# Altium PCB PCB1.PcbDoc
Units mm, origin at the board's own origin, x right, y up, seen from the top; angles counter-clockwise.
Board outline 43 x 53.5 mm, 2 copper layers (Top Layer, Bottom Layer), stack 1.64 mm thick; 48 components, 28 nets, 241 pads, 77 vias.
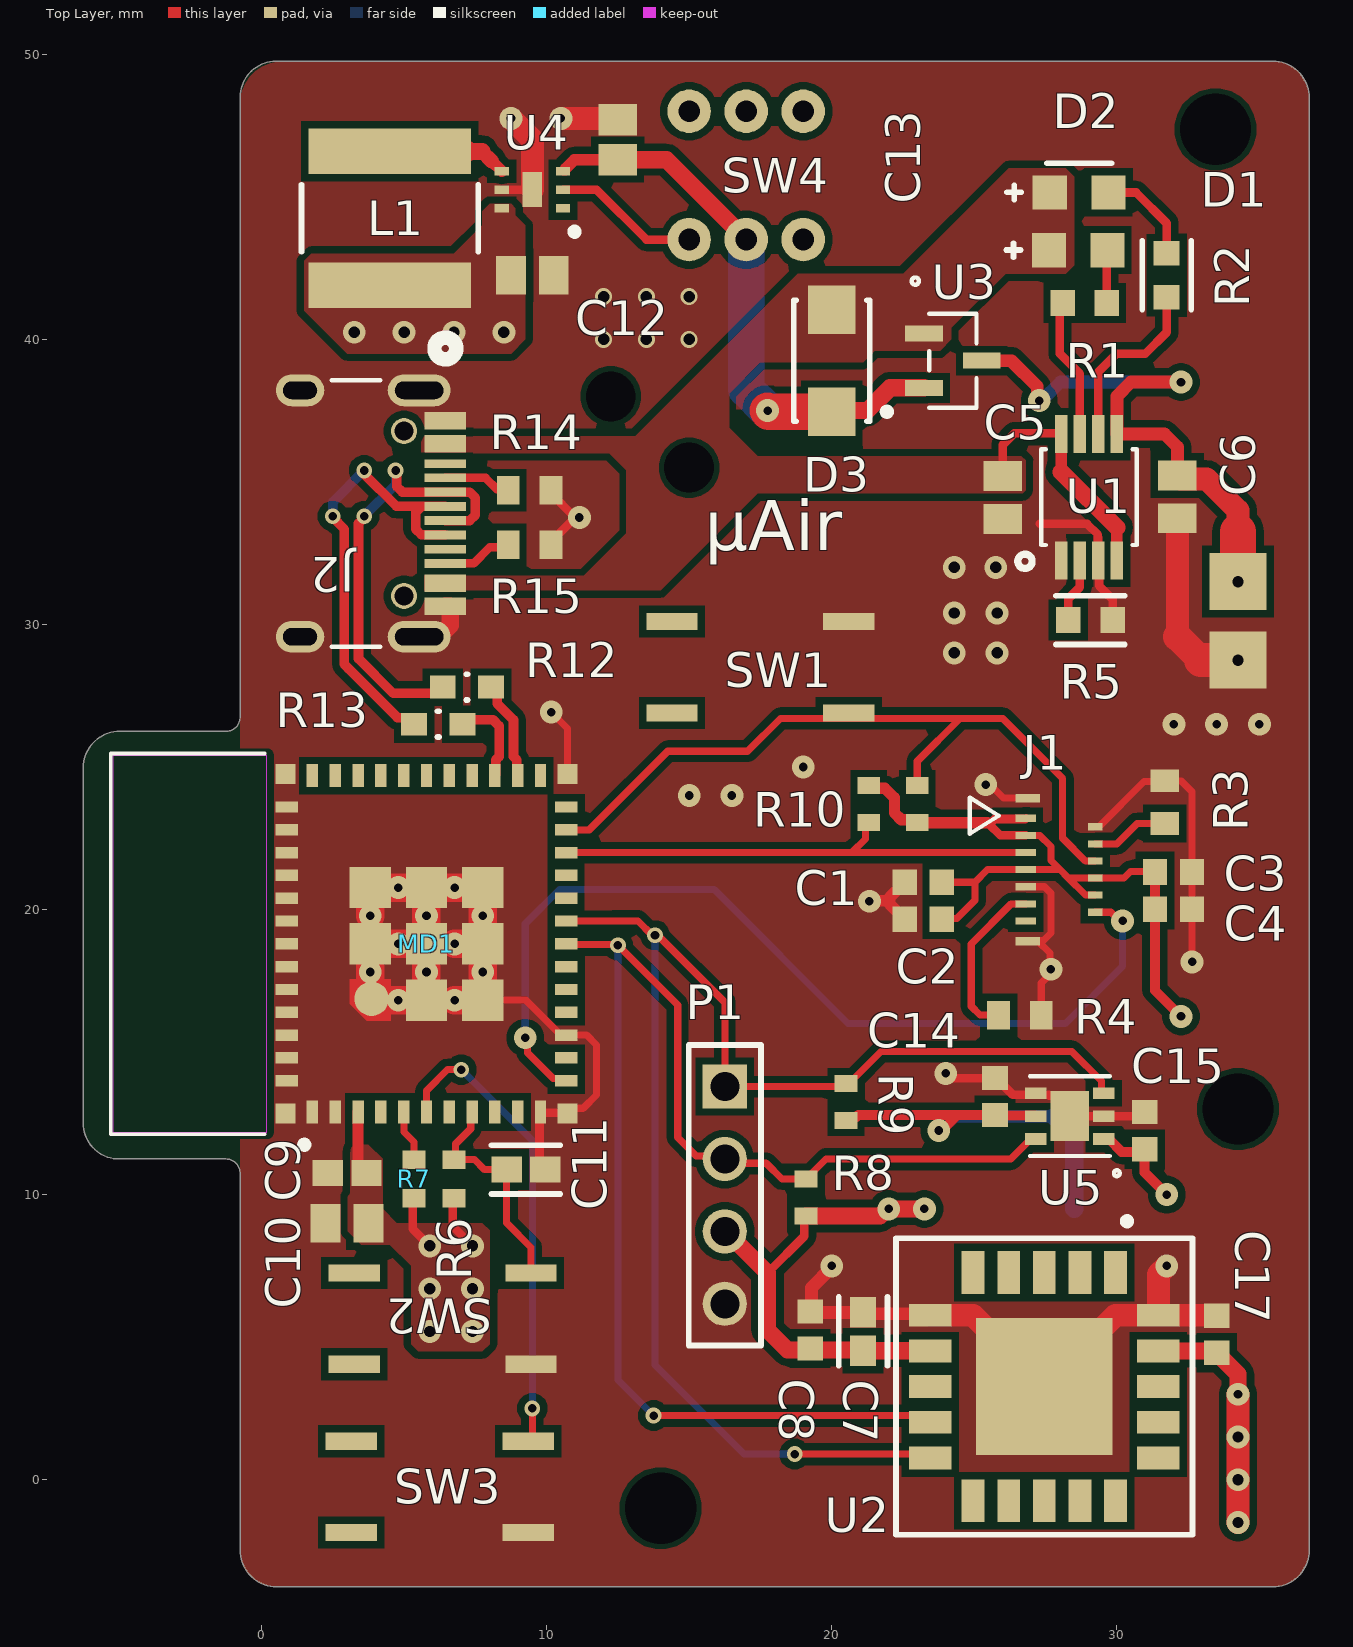
[diagram p0: Top Layer view]
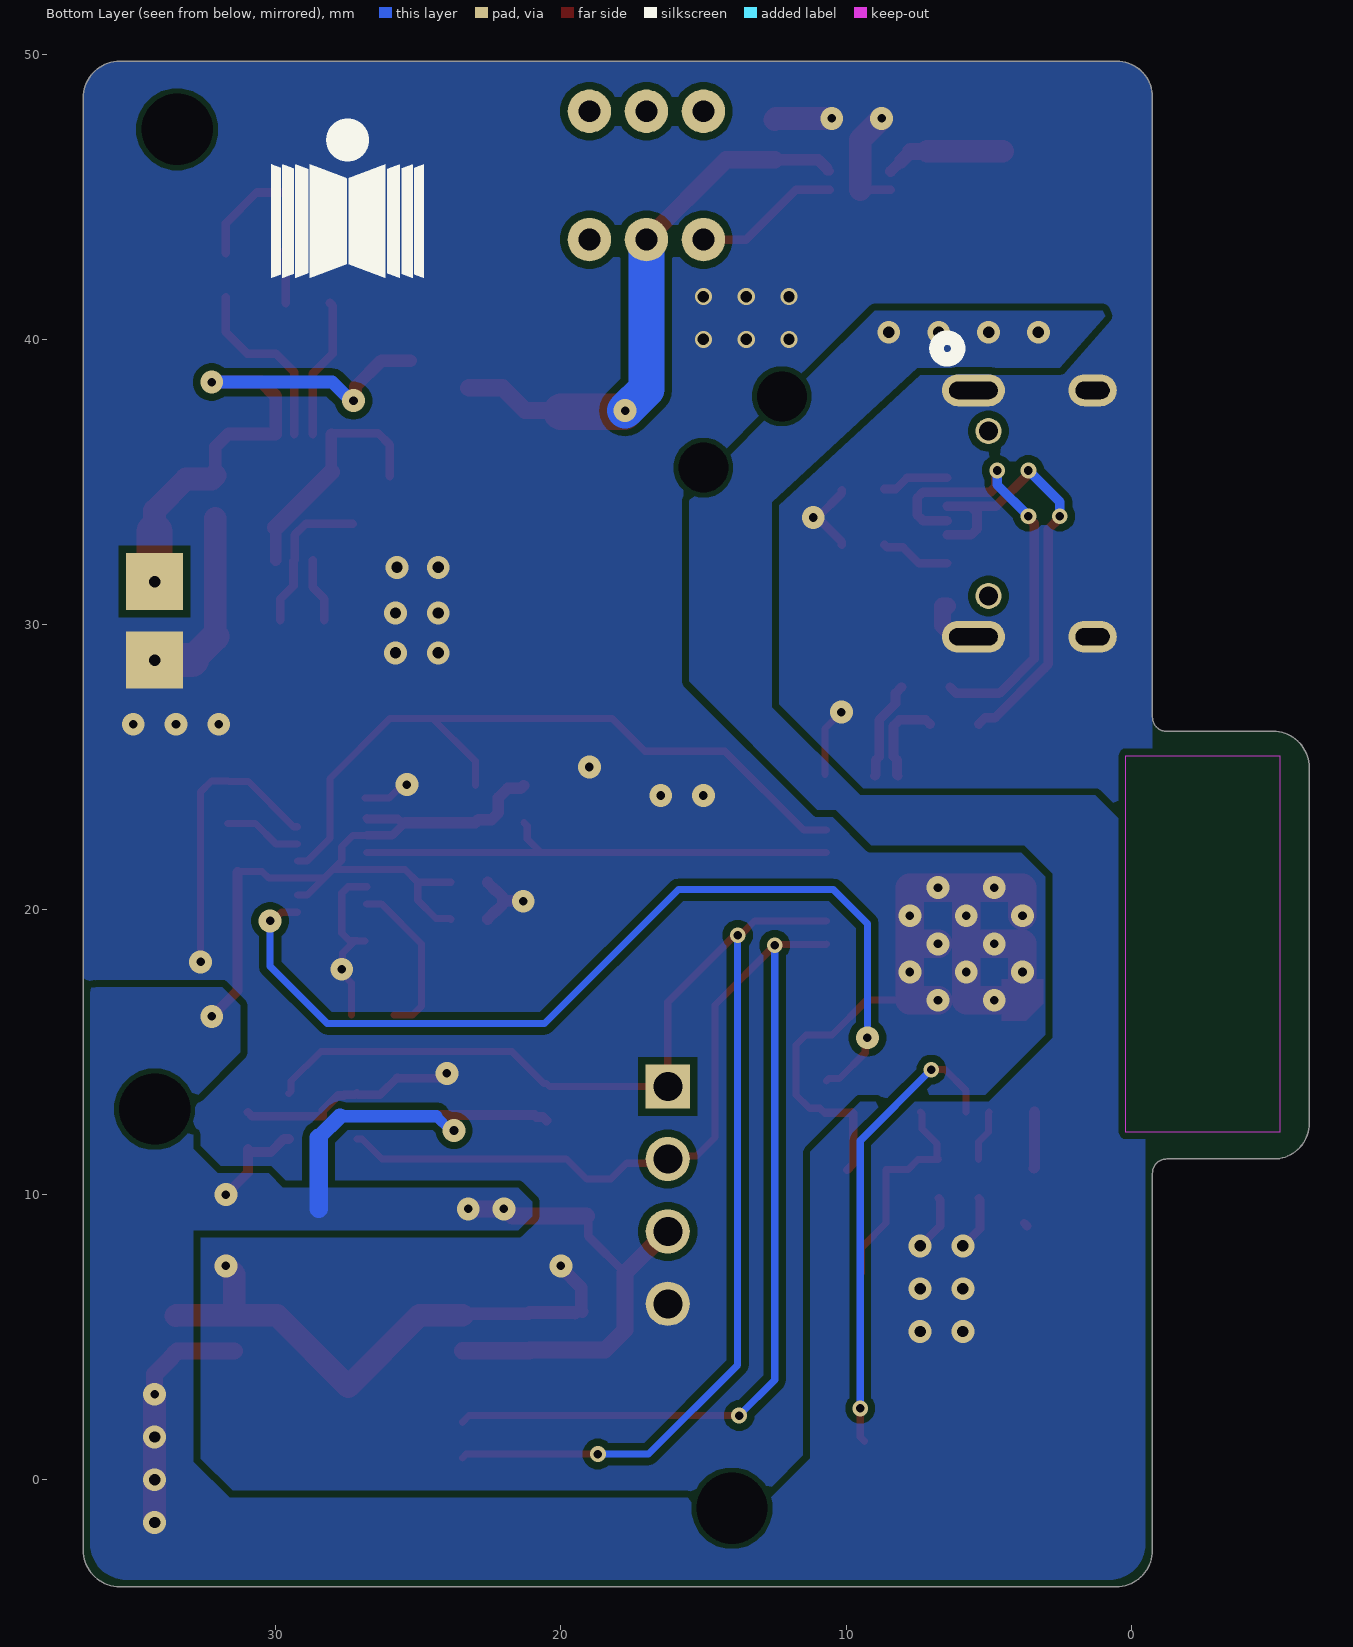
[diagram p1: Bottom Layer view, seen from below]

## Layer stack, top to bottom
Top Solder: solder mask 0.0102, Solder Resist, Dk 3.5
Top Layer: signal copper 0.07
Dielectric 1: dielectric 1.5, FR-4, Dk 4.8
Bottom Layer: signal copper 0.07
Bottom Solder: solder mask 0.0102, Solder Resist, Dk 3.5

## Board outline
-5,11.25 cw(c-5,12.5) -6.25,12.5 -6.25,24.98 cw(c-4.98,24.98) -4.98,26.25 -1.25,26.25 ccw(c-1.25,26.75) -0.75,26.75 -0.75,48.5 cw(c0.5,48.5) 0.5,49.75 35.48,49.75 cw(c35.48,48.48) 36.75,48.48 36.75,-2.48 cw(c35.48,-2.48) 35.48,-3.75 0.52,-3.75 cw(c0.52,-2.48) -0.75,-2.48 -0.75,10.75 ccw(c-1.25,10.75) -1.25,11.25

## Design rules (kind name [scope] priority, off if disabled: settings)
BoardOutlineClearance [All] p1: gap=0.5 ignorepadtopadclearanceinfootprint=FALSE except(0: Fill-OutlineEdge Fill-CavityEdge Fill-CutoutEdge Fill-SplitBarrior Fill-SplitContinuation Poly-OutlineEdge Region-OutlineEdge Text-OutlineEdge; 1: Poly-CutoutEdge Region-CutoutEdge Text-CutoutEdge; 3: Poly-CavityEdge Poly-SplitBarrior Poly-SplitContinuation Region-CavityEdge Region-SplitBarrior Region-SplitContinuation Text-CavityEdge Text-SplitBarrior Text-SplitContinuation)
Clearance [All] p1: gap=0.254 ignorepadtopadclearanceinfootprint=TRUE except(0.13: SMDPad-SMDPad; 0.15: Arc-Arc Arc-Track Arc-SMDPad Arc-THPad Track-Track Track-SMDPad Track-THPad; 0.178: Arc-Hole Track-Hole SMDPad-THPad SMDPad-Hole THPad-Hole Via-Hole Fill-Hole Poly-Hole Region-Hole Text-Hole; 0.2: Via-Via; 0.25: Arc-Via Track-Via)
DiffPairsRouting [All] p1: maxlimit=0.18 minlimit=0.16 mostfreqgap=0.16 toplayer_minwidth=0.3 toplayer_maxwidth=0.5 toplayer_prefwidth=0.334 bottomlayer_minwidth=0.3 bottomlayer_maxwidth=0.5 bottomlayer_prefwidth=0.334 impedanceprofiledriven=TRUE impedanceprofileid={9D25BB9F-9C6A-4115-A333-6D22519091E7} impedanceprofilevalue=90.000000 maxuncoupledlength=12.7
HoleSize [All] p1: absolutevalues=TRUE maxlimit=2.54 minlimit=0.1 maxpercent=80.000 minpercent=20.000
HoleToHoleClearance [All] p1: gap=0.2 allowstackedmicrovias=TRUE
MinimumAnnularRing [All] p1: minimumring=0.1
MinimumSolderMaskSliver [All] p1: minsoldermaskwidth=0.08
PlaneClearance [All] p1: clearance=0.3
PlaneConnect [All] p1: planeconnectstyle=Direct reliefexpansion=0.508 reliefentries=4 reliefconductorwidth=0.254 reliefairgap=0.254
PolygonConnect [All] p1: connectstyle=Direct reliefconductorwidth=0.254 reliefentries=4 polygonreliefangle="90 Angle" airgapwidth=0.254
RoutingVias [All] p1: holewidth=0.25 width=0.4 viastyle="Through Hole" minholewidth=0.15 minwidth=0.27 maxholewidth=0.711 maxwidth=1.27
SolderMaskExpansion [All] p1: expansion=0.102 istentingtop=FALSE
SupplyNets "Schematic Supply Nets_4" [InNet('VBUS')] p1: voltage=0.000
SupplyNets "Schematic Supply Nets_5" [InNet('VDD')] p2: voltage=0.000
SupplyNets "Schematic Supply Nets_7" [InNet('GND')] p3: voltage=0.000
SupplyNets "Schematic Supply Nets_6" [InNet('VBAT')] p4: voltage=0.000
SupplyNets "Schematic Supply Nets_3" [InNet('VBUS')] p5: voltage=0.000
SupplyNets "Schematic Supply Nets_2" [InNet('VDD')] p6: voltage=0.000
SupplyNets "Schematic Supply Nets_1" [InNet('VBAT')] p7: voltage=0.000
SupplyNets "Schematic Supply Nets" [InNet('GND')] p8: voltage=0.000
UnRoutedNet [All] p1: checkbadconnections=TRUE
Width [All] p1: maxlimit=1.27 minlimit=0.2 preferedwidth=0.3
23 further rules are at their usual default settings.

## Classes and differential pairs
component class Sheet1: C1 C2 C3 C4 C5 C6 C7 C8 C9 C10 C11 C12 C13 C14 C15 C17 D1 D2 D3 J1 J2 L1 P1 R1 R2 R3 R4 R5 R8 R9 R10 R12 R13 R14 R15 SW1 SW2 SW3 SW4 U1 U2 U3 U4 U5
differential pair USB_D: +USB_D_P -USB_D_N
differential pair USB: +USB_P -USB_N

## Components (designator, comment, footprint, x,y, rotation, side; value= is the part's Value field where it differs from the comment)
C1 "C0603C105K4RACTU" CAPC1608X90X35LL15T15 23.209,20.959 r0 top value=1µF
C2 "C0603C105K4RACTU" CAPC1608X90X35LL15T15 23.209,19.659 r0 top value=1µF
C3 "C0603C105K4RACTU" CAPC1608X90X35LL15T15 31.985,21.315 r180 top value=1µF
C4 "C0603C105K4RACTU" CAPC1608X90X35LL15T15 31.985,20.015 r180 top value=1µF
C5 "GRM21BR71A106KE51L" CAPC2013X140X45LL15T25 26,34.45 r90 top value=10µF
C6 "GRM21BR71A106KE51L" CAPC2013X140X45LL15T25 32.125,34.475 r90 top value=10µF
C7 "CC0603KRX7R9BB104" FP-CC0603-DA-IPC_B 21.1,5.2 r270 top value=100nF
C8 "C0603C105K4RACTU" CAPC1608X90X35LL15T15 19.25,5.25 r270 top value=1µF
C9 "CC0603KRX7R9BB104" FP-CC0603-DA-IPC_B 3,10.75 r180 top value=100nF
C10 "GRM21BR71A106KE51L" CAPC2013X140X45LL15T25 3,9 r0 top value=10µF
C11 "CC0603KRX7R9BB104" FP-CC0603-DA-IPC_B 9.275,10.875 r0 top value=100nF
C12 "GRM21BR71A106KE51L" CAPC2013X140X45LL15T25 9.5,42.25 r180 top value=10µF
C13 "08053D475KAT2A" CAPC2013X140X50LL20T25 12.5,47 r270 top value=4.7µF
C14 "C0603C105K4RACTU" CAPC1608X90X35LL15T15 25.728,13.444 r270 top value=1µF
C15 "C0603C105K4RACTU" CAPC1608X90X35LL15T15 30.978,12.244 r270 top value=1µF
C17 "C0603C105K4RACTU" CAPC1608X90X35LL15T15 33.5,5.1 r270 top value=1µF
D1 "RED" FP-SM0805YCL-MFG 28.65,43.125 r0 top
D2 "GREEN" FP-SM0805YCL-MFG 28.675,45.15 r0 top
D3 "SS14-E3/5AT" VISH-DO-214AC-2_V 20,39.25 r270 top
J1 "5035661302" CON_5035661302_MOL 27.93,21.405 r270 top
J2 "TYPE-C-31-M-12" CONN12_C-31-M-12_HRO 6.446,37.14 r270 top locked
L1 "NRS6028T2R2NMGJ" FP-NR6028-MFG 4.5,44.25 r90 top value=2.2µH
MD1 "ESP32-C3-MINI-1-H4" FP-ESP32-C3-MINI-1-H4-MFG 5.785,18.796 r90 top locked
P1 "TSW-104-08-G-S" SMTC-TSW-104-08-X-S 16.25,13.79 r270 top
R1 "1.3K" FP-AC0603-IPC_B 28.875,41.275 r0 top
R2 "1.3K" FP-AC0603-IPC_B 31.75,42.25 r90 top
R3 "RC0603FR-075K1L" RESC1608X55X25ML10T15 31.685,23.765 r270 top value=5.1k
R4 "RC0603FR-075K1L" RESC1608X55X25ML10T15 26.6,16.3 r180 top value=5.1k
R5 "1.3K" FP-AC0603-IPC_B 29.075,30.15 r180 top
R6 "RC0603FR-0710KL" FP-RC0603-0_55-IPC_C 6.75,10.55 r90 top value=10k
R7 "RC0603FR-0710KL" FP-RC0603-0_55-IPC_C 5.35,10.55 r90 top value=10k
R8 "RC0603FR-074K7L" RESC1608X55X25LL10T15 19.1,9.9 r90 top value=4.7k
R9 "RC0603FR-074K7L" RESC1608X55X25LL10T15 20.5,13.25 r90 top value=4.7k
R10 "RC0603FR-074K7L" RESC1608X55X25LL10T15 21.3,23.7 r270 top value=4.7k
R11 "RC0603FR-074K7L" RESC1608X55X25LL10T15 23,23.7 r90 top value=4.7k
R12 "RC0603FR-070RL" FP-RC0603-MFG 7.2,27.8 r0 top value=0
R13 "RC0603FR-070RL" FP-RC0603-MFG 6.2,26.5 r0 top value=0
R14 "RC0603FR-075K1L" RESC1608X55X25ML10T15 9.4,34.7 r180 top value=5.1k
R15 "RC0603FR-075K1L" RESC1608X55X25ML10T15 9.4,32.8 r180 top value=5.1k
SW1 "Tact Switch 6x6" "Tact Switch 6x6-Footprint-1" 17.5,28.5 r0 top
SW2 "Tact Switch 6x6" "Tact Switch 6x6-Footprint-1" 6.35,5.65 r180 top
SW3 "Tact Switch 6x6" "Tact Switch 6x6-Footprint-1" 6.25,-0.25 r180 top
SW4 "Self Locking Switch" "Self Locking Switch-Footprint-1" 19,48 r270 top
U1 "TP4056-42-ESOP8" TP4056-42-ESOP8_TPW 29.026,34.464 r90 top
U2 "SCD40-D-R2" FP-SCD40-D-R2-MFG 27.456,3.266 r270 top
U3 "SI2305CDS-T1-GE3" TO-236_VIS 24.25,39.25 r270 top
U4 "RT8010-33GQW" RT8010-GQW 9.5,45.25 r180 top
U5 "SGP41-D-R4" DFN_SGP41-D-R4_SEN 28.35,12.75 r180 top locked

## Footprints (in the part's own frame and the unit in brackets; to place one, negate y for a bottom-side part, rotate by r counter-clockwise, add the part's x,y. Pads: shape width x height; smd on the part's side, far side on the other; paste and mask are expansions set on the pad)
CAPC1608X90X35LL15T15 [mm] "Chip Capacitor, 2-Leads, Body 1.60x0.81mm, IPC High Density"
  rect 0.85x0.9 smd: 1(-0.65,0) 2(0.65,0)
  body extent -0.88,-0.48 0.87,0.48, height 0.9
CAPC2013X140X45LL15T25 [mm] "Chip Capacitor, 2-Leads, Body 2.00x1.25mm, IPC High Density"
  rect 1.05x1.35 smd: 1(-0.75,0) 2(0.75,0)
  body extent -1.08,-0.7 1.07,0.7, height 1.4
CAPC2013X140X50LL20T25 [mm] "Chip Capacitor, 2-Leads, Body 2.00x1.25mm, IPC High Density"
  rect 1.1x1.35 smd: 1(-0.7,0) 2(0.7,0)
  body extent -1.1,-0.72 1.1,0.72, height 1.4
CON_5035661302_MOL [mm]
  rect 0.25x0.72 smd paste+0 mask+0.025: 1(-1.795,-1.12) 3(-1.195,-1.12) 5(-0.595,-1.12) 7(0.005,-1.12) 9(0.605,-1.12) 11(1.205,-1.12) 13(1.805,-1.12)
  rect 0.25x0.52 smd paste+0 mask+0.025: 2(-1.5,1.31) 4(-0.9,1.31) 6(-0.3,1.31) 8(0.3,1.31) 10(0.9,1.31) 12(1.5,1.31)
  rect 0.3x0.85 smd paste+0 mask+0.025: P1(-2.505,-1.054) P2(2.515,-1.054)
  silkscreen extent -2.52,-3.09 -1.25,-2.07
CONN12_C-31-M-12_HRO [mil]
  oval 44x87 / inner round 60 / far side oval 44x87 hole 24 slot 67 at 90 deg paste-99999 mask+0: 13(-42.12,-36.06) 14(298.04,-36.06)
  oval 44x67 / inner round 60 / far side oval 44x67 hole 24 slot 47 at 90 deg paste-99999 mask+0: 15(-42.12,-200.63) 16(298.04,-200.63)
  round 36 / inner round 60 / far side round 36 hole 26 paste-99999 mask-18: 17(14.18,-56.93) 18(241.74,-56.93)
  rect 24x57 smd paste-28.5 mask+1.97: A1-B12(0,0) A4-B9(31.51,0) B1-A12(255.92,0) B4-A9(224.41,0)
  rect 12x57 smd paste-28.5 mask+1.97: A5(78.75,0) A8(177.18,0) B5(196.87,0) B8(59.06,0)
  rect 12.24x57 smd paste-28.5 mask+1.97: A6(118.12,0) A7(137.81,0) B6(157.5,0) B7(98.43,0)
  silkscreen extent -115,-157 312,15
DFN_SGP41-D-R4_SEN [mil]
  rect 30x16 smd paste+0 mask+0: 1(-47,31.5) 2(-47,0) 3(-47,-31.5) 4(47,-31.5) 5(47,0) 6(47,31.5)
  rect 53x69 smd paste+0 mask+0: 7(0,0)
  silkscreen extent -69,-55 55,83, body extent -50,-50 50,50, height 37
FP-AC0603-IPC_B [mm]
  rect 0.859x0.912 smd paste+0 mask+0: 1(-0.777,0) 2(0.777,0)
  body extent -1.46,-0.71 1.46,0.71, height 0.25
FP-CC0603-DA-IPC_B [mm]
  rect 1.058x0.912 smd paste+0 mask+0: 1(-0.677,0) 2(0.677,0)
  silkscreen extent -1.21,-0.86 1.21,0.86, body extent -1.46,-0.71 1.46,0.71, height 0.25
FP-ESP32-C3-MINI-1-H4-MFG [mm]
  rect 0.8x0.4 smd paste+0 mask+0: 1(-5.9,4) 2(-5.9,3.2) 3(-5.9,2.4) 4(-5.9,1.6) 5(-5.9,0.8) 6(-5.9,0) 7(-5.9,-0.8) 8(-5.9,-1.6) 9(-5.9,-2.4) 10(-5.9,-3.2) 11(-5.9,-4) 25(5.9,-4) 26(5.9,-3.2) 27(5.9,-2.4) 28(5.9,-1.6) 29(5.9,-0.8) 30(5.9,0) 31(5.9,0.8) 32(5.9,1.6) 33(5.9,2.4) 34(5.9,3.2) 35(5.9,4)
  rect 0.4x0.8 smd paste+0 mask+0: 12(-4.8,-4.9) 13(-4,-4.9) 14(-3.2,-4.9) 15(-2.4,-4.9) 16(-1.6,-4.9) 17(-0.8,-4.9) 18(0,-4.9) 19(0.8,-4.9) 20(1.6,-4.9) 21(2.4,-4.9) 22(3.2,-4.9) 23(4,-4.9) 24(4.8,-4.9) 36(4.8,4.9) 37(4,4.9) 38(3.2,4.9) 39(2.4,4.9) 40(1.6,4.9) 41(0.8,4.9) 42(0,4.9) 43(-0.8,4.9) 44(-1.6,4.9) 45(-2.4,4.9) 46(-3.2,4.9) 47(-4,4.9) 48(-4.8,4.9)
  rect 1.45x1.45 smd paste+0 mask+0: 49(-1.975,-1.975) 49(-1.975,0) 49(0,1.975) 49(0,0) 49(0,-1.975) 49(1.975,-1.975) 49(1.975,0) 49(1.975,1.975)
  round 1.207 smd paste+0 mask+0: 49(-1.926,1.926)
  rect 0.7x0.7 smd paste+0 mask+0: 50(5.95,4.95) 51(5.95,-4.95) 52(-5.95,-4.95) 53(-5.95,4.95)
  Top Layer region: -2.7,1.25 -2.7,2.1 -2.1,2.7 -1.25,2.7 -1.25,1.25
  Keep-Out Layer region: -6.6,5.6 6.6,5.6 6.6,11 -6.6,11
  silkscreen extent -7.17,4.16 6.68,11.07, body extent -6.78,-5.77 6.78,11.17, height 0.25
FP-NR6028-MFG [mm]
  rect 1.6x5.7 smd paste+0 mask+0: 1(-2.35,0) 2(2.35,0)
  silkscreen extent -1.17,-3.1 1.17,3.1, body extent -3.25,-3.2 3.25,3.2, height 0.25
FP-RC0603-0_55-IPC_C [mm]
  rect 0.659x0.812 smd paste+0 mask+0: 1(-0.677,0) 2(0.677,0)
  body extent -1.11,-0.55 1.11,0.55, height 0.25
FP-RC0603-MFG [mm]
  rect 0.9x0.8 smd paste+0 mask+0: 1(-0.85,0) 2(0.85,0)
  silkscreen extent -0.03,-0.45 0.03,0.45, body extent -1.4,-0.55 1.4,0.55, height 0.25
FP-SCD40-D-R2-MFG [mm]
  rect 1.5x0.8 smd paste-1000 mask-1000: 1(-4,2.5) 2(-4,1.25) 3(-4,0) 4(-4,-1.25) 5(-4,-2.5) 11(4,-2.5) 12(4,-1.25) 13(4,0) 14(4,1.25) 15(4,2.5)
  rect 0.8x1.5 smd paste-1000 mask-1000: 6(-2.5,-4) 7(-1.25,-4) 8(0,-4) 9(1.25,-4) 10(2.5,-4) 16(2.5,4) 17(1.25,4) 18(0,4) 19(-1.25,4) 20(-2.5,4)
  rect 4.8x4.8 smd paste-1000 mask-1000: 21(0,0)
  silkscreen extent -5.92,-5.2 5.2,5.2, body extent -5.3,-5.3 5.3,5.3, height 0.25
FP-SM0805YCL-MFG [mil]
  rect 47x47 smd paste+0 mask+0: 1(-40.5,0) 2(40.5,0)
  silkscreen extent -100,-10 -80,10, body extent -68,-33 68,33, height 10
RESC1608X55X25LL10T15 [mm] "Chip Resistor, 2-Leads, Body 1.60x0.80mm, IPC High Density"
  rect 0.6x0.8 smd: 1(-0.65,0) 2(0.65,0)
  body extent -0.85,-0.45 0.85,0.45, height 0.55
RESC1608X55X25ML10T15 [mm] "Chip Resistor, 2-Leads, Body 1.60x0.80mm, IPC Low Density"
  rect 0.8x1 smd: 1(-0.75,0) 2(0.75,0)
  body extent -0.85,-0.45 0.85,0.45, height 0.55
RT8010-GQW [mm] "QFN, 6-Leads, Body 2.00x2.00mm, Pitch 0.65mm, Thermal Pad 0.68x1.23mm, IPC Medium Density"
  rect 0.5x0.3 smd: 1(-1.075,0.65) 2(-1.075,0) 3(-1.075,-0.65) 4(1.075,-0.65) 5(1.075,0) 6(1.075,0.65)
  rect 0.68x1.23 smd: 7(0,0)
  silkscreen extent -1.6,1.35 -1.35,1.6, body extent -1.03,-1.02 1.03,1.02, height 0.8
"Self Locking Switch-Footprint-1" [mil]
  round 60 hole 30: 1(0,0) 2(0,-78.74) 3(0,-157.48) 4(177.17,-157.48) 5(177.17,-78.74) 6(177.17,0)
SMTC-TSW-104-08-X-S [mm] ".025 SQ Post Terminal Strip Assembly, 1x4 Pins, Vertical, 2.54mm Pitch, Male"
  rect 1.55x1.55 hole 1.02: 1(0,0)
  round 1.55 hole 1.02: 2(2.54,0) 3(5.08,0) 4(7.62,0)
  silkscreen extent -1.46,-1.27 9.08,1.27, body extent -1.27,-1.27 8.89,1.27, height 8.38
"Tact Switch 6x6-Footprint-1" [mm]
  rect 1.8x0.6 smd: 1(-3.1,1.6) 2(3.1,1.6) 3(-3.1,-1.6) 4(3.1,-1.6)
TO-236_VIS [mil]
  rect 22x52 smd paste+0 mask+0: 1(-37.4,-40) 2(37.4,-40) 3(0,40)
  silkscreen extent -115,-57 65,33, body extent -60,-52 60,52, height 44
TP4056-42-ESOP8_TPW [mil]
  rect 52.5x17 smd paste+0 mask+0: 1(-87.25,38.39) 2(-87.25,12.8) 3(-87.25,-12.8) 4(-87.25,-38.39) 5(87.25,-38.39) 6(87.25,-12.8) 7(87.25,12.8) 8(87.25,38.39)
  silkscreen extent -98,-66 66,98, body extent -99,-61 99,61, height 43
VISH-DO-214AC-2_V [mm] "SMA, 2-Leads, Body 4.245x2.665mm, Height 2.29mm"
  rect 1.7x1.68 smd: 1(-1.79,0) 2(1.79,0)
  silkscreen extent -2.12,-1.33 2.12,2.06, body extent -2.57,-1.33 2.57,1.33, height 2.29

## Part data
C1 C2 C3 C4 C8 C14 C15 C17: library part CMP-001-00093-1, "16V 1uF X7R ±10% 0603 Multilayer Ceramic Capacitors MLCC - SMD/SMT ROHS", Case Code (Imperial)=0603, Case Code (Metric)=1608, Dielectric=X7R, Dielectric Material=Ceramic, Max Operating Temperature=125°C, Min Operating Temperature=-55°C, Tolerance=10%, Voltage=16V, Case/Package=0603, China RoHS=Compliant, Contact Plating=Tin, Country of Origin=Mexico, Depth=800µm, Dissipation Factor=3.5%, Export Control Classification Number (ECCN) Code=EAR99, Harmonized Tariff Schedule (HTS) Code=8532.24.00.20, Height=800µm, Introduction Date=2008-12-01, Length=1.6mm, Lifecycle Status=Production, Material=Ceramic, Mounting Technology="Surface Mount", Number of Terminals=2, Packaging="Cut Tape", Pins=2, Radiation Hardening=No, REACH SVHC=Yes, RoHS=Compliant, Schedule B="8532240020, 8532240020", Termination=SMD/SMT, Thickness=889µm, Voltage Rating=16V, Voltage Rating (DC)=16V, Width=800µm
C5 C6 C10 C12: library part CMP-001-00091-1, "Multilayer Ceramic Capacitor, 10 uF, 10 V, ± 10%, X7R, 0805 [2012 Metric]", Case Code (Imperial)=0805, Case Code (Metric)=2012, Dielectric=X7R, Dielectric Material=Ceramic, Manufacturer Lifecycle Status="TO BE DISCONTINUED", Max Operating Temperature=125°C, Min Operating Temperature=-55°C, Tolerance=10%, Voltage=10V, Case/Package=0805, Country of Origin=Philippines, Depth=1.25mm, Export Control Classification Number (ECCN) Code=EAR99, Harmonized Tariff Schedule (HTS) Code=8532.24.00.20, Height=1.25mm, Introduction Date=2006-06-22, Lead Free="Lead Free", Length=2mm, Lifecycle Status=EOL, Mounting Technology="Surface Mount", Number of Terminals=2, Pins=2, REACH SVHC=Yes, RoHS=Compliant, Schedule B=8532240020, Termination=SMD/SMT, Thickness=1.25mm, Voltage Rating=10V, Voltage Rating (DC)=10V, Width=1.25mm
C7 C9 C11: library part CMP-001-00092-1, "Multilayer Ceramic Capacitor, CC Series, 0.1 - F, - 10%, X7R, 50 V, 0603 [1608 Metric]", Case Code (Imperial)=0603, Case Code (Metric)=1608, Dielectric=X7R, Dielectric Material=Ceramic, Max Operating Temperature=125°C, Min Operating Temperature=-55°C, Tolerance=10%, Voltage=50V, Case/Package=0603, China RoHS=Compliant, Country of Origin="Mainland China, Taiwan", Depth=800µm, Export Control Classification Number (ECCN) Code=EAR99, Halogen Free="Halogen Free", Harmonized Tariff Schedule (HTS) Code=8532.24.00.20, Height=800µm, Introduction Date=2005-08-18, Lead Free="Lead Free", Length=1.6mm, Lifecycle Status=Production, Material=Ceramic, Mounting Technology="Surface Mount", Number of Terminals=2, Pins=2, Radiation Hardening=No, REACH SVHC=Yes, RoHS=Compliant, Schedule B="8532240020, 8532240020", Termination=SMD/SMT, Thickness=889µm, Voltage Rating=50V, Voltage Rating (DC)=50V, Width=800µm
C13: library part CMP-001-00094-1, "0805 Standard 4.7UF Ceramic Multilayer Cap, 25V DC, +85C, X5R Dielectric, +/-10% SMD", Case Code (Imperial)=0805, Case Code (Metric)=2012, Dielectric=X5R, Dielectric Material=Ceramic, Max Operating Temperature=85°C, Min Operating Temperature=-55°C, Tolerance=10%, Voltage=25V, Case/Package=0805, China RoHS=Compliant, Contact Plating=Tin, Depth=1.25mm, Export Control Classification Number (ECCN) Code=EAR99, Harmonized Tariff Schedule (HTS) Code=8532.24.00.20, Height=1.4mm, Introduction Date=2005-08-15, Lead Free="Lead Free", Length=2.01mm, Lifecycle Status=Production, Material=Ceramic, Mounting Technology="Surface Mount", Number of Terminals=2, Packaging="Cut Tape", Pins=2, Radiation Hardening=No, REACH SVHC=Yes, RoHS=Compliant, Schedule B=8532240020, Termination=SMD/SMT, Thickness=1.397mm, Voltage Rating=25V, Voltage Rating (DC)=25V, Width=1.25mm
D1 D2: library part CMP-35283-000007-1, "LED YELLOW CLEAR 0805 SMD", Case Code (Imperial)=0805, Case Code (Metric)=2012, Color=Yellow, Forward Current=2mA, Forward Voltage=1.9V, Lens Color=Colorless, Max Operating Temperature=80°C, Min Operating Temperature=-30°C, Package Quantity=4000, Case/Package=0805, Dominant Wavelength=592nm, Height=0.8mm, Illumination Color=Yellow, Lead Free="Lead Free", Length=2mm, Lens Transparency=Clear, Luminous Intensity=11.5mcd, Mount="Surface Mount", Packaging="Tape and Reel", Test Current=2mA, Viewing Angle=130°, Width=1.2mm
D3: library part CMP-004-00031-1, "Rectifier Diode, Schottky, 1 Phase, 1 Element, 1A, 40V V(RRM), Silicon, DO-214AC", Average Rectified Current=1A, Case/Package=SMA, Forward Voltage=500mV, Max Forward Surge Current (Ifsm)=40A, Max Operating Temperature=150°C, Max Repetitive Reverse Voltage (Vrrm)=40V, Max Reverse Leakage Current=200µA, Min Operating Temperature=-65°C, China RoHS=Non-Compliant, Contact Plating=Tin, Country of Origin="Mainland China", Element Configuration=Single, Export Control Classification Number (ECCN) Code=EAR99, Forward Current=1A, Harmonized Tariff Schedule (HTS) Code=8541.10.00.80, Introduction Date=2006-05-29, Lead Free="Lead Free", Length=4.6mm, Lifecycle Status=Production, Max Output current=1A, Max Reverse Voltage (DC)=40V, Max Surge Current=40A, Mounting Technology="Surface Mount", Number of Elements=1, Number of Terminals=2, Packaging="Cut Tape", Peak Non-Repetitive Surge Current=40A, Peak Reverse Current=200µA, Pins=2, Radiation Hardening=No, REACH SVHC=No, Reverse Standoff Voltage=40V, RoHS=Compliant, Schedule B="8541100080, 8541100080", Width=2.9mm
J1: library part CMP-002-00080-1, "Easy-On FPC Connector, 0.30mm Pitch, Right-Angle, Bottom Contact, 0.95mm  Height, 13 Circuits, Gold over Nickel Plating", Manufacturer_Name="Molex Connector Corporation", Copyright="Copyright (C) 2026 Ultra Librarian. All rights reserved.", Design Item ID=5035661302, Manufacturer_Part_Number=5035661302, RefDes=RefDes, Source=5035661302.SchLib, Type=Type
J2: library part CMP-002-00081-1, "Description", Manufacturer_Name="HRO Electronics", Copyright="Copyright (C) 2025 Ultra Librarian. All rights reserved.", Design Item ID=TYPE-C-31-M-12, Manufacturer_Part_Number=TYPE-C-31-M-12, RefDes=RefDes, Source=TYPE-C-31-M-12.SchLib, Type=Type
L1: library part CMP-006-00021-1, "Inductor Power Shielded Wirewound 2.2uH 30% 100KHz Ferrite 3.7A 0.026Ohm DCR 2424 T/R", Case/Package=2424, Current Rating=3.7A, DC Resistance (DCR)=26mΩ, Inductance Tolerance=30%, Max Operating Temperature=125°C, Max Saturation Current=4.2A, Min Operating Temperature=-25°C, Self Resonant Frequency=68MHz, Test Frequency=100kHz, Composition=Wirewound, Core Material=Ferrite, Depth=6.2mm, ESR=26mΩ, Export Control Classification Number (ECCN) Code=EAR99, Halogen Free="Halogen Free", Harmonized Tariff Schedule (HTS) Code=8504.50.80.00, Height=2.8mm, Height - Seated (Max)=2.794mm, Introduction Date=2010-08-25, Lead Free="Lead Free", Lead Pitch=4.7mm, Length=6mm, Lifecycle Status=Production, Max Current Rating=3.7A, Max DC Current=3.7A, Max Length=6.2mm, Max Temperature Rise Current=3.7A, Max Width=6.2mm, Min Length=5.8mm, Min Width=5.8mm, Mounting Technology="Surface Mount", Number of Circuits=1, Number of Terminals=2, Pins=2, Radiation Hardening=No, REACH SVHC=Yes, RMS Current (Irms)=3.7A, RoHS=Compliant, Saturation Current=4.2A, Shielding=Unshielded, Temperature Rise Current=4.2A, Termination=SMD/SMT, Tolerance=30%, Width=6mm
MD1: library part CMP-020-00024-1, "-96dBm 20.5dBm PCBAntenna 2.4GHz SMD, 13.2x16.6mm WiFi Modules ROHS", Ambient Temperature Range High=85°C, Clock Frequency=2.484GHz, Current - Receiving=84mA, Current - Transmitting=350mA, Max Operating Temperature=105°C, Max Supply Voltage=3.6V, Min Operating Temperature=-40°C, Min Supply Voltage=3V, Operating Supply Voltage=3.3V, Contact Plating=Gold, Data Rate=150Mbps, Harmonized Tariff Schedule (HTS) Code=8542.31.00.30, Height=2.55mm, Height - Seated (Max)=2.55mm, Interface=SPI, Length=16.6mm, Number of GPIO=13, Number of Terminals=53, REACH SVHC=No, RoHS=Compliant, Terminal Pitch=800µm, Width=13.2mm
P1: library part CMP-1024-00357-1, "0.025\" SQ Post Header, Through-hole, Vertical, -55 to 125 degC, 2.54 mm Pitch, 4-Pin, Male, RoHS", Manufacturer=Samtec, Temperature Range="-55 to 125 degC", ComponentLink1Description="Manufacturer URL", ComponentLink1URL=http://www.samtec.com, ComponentLink2Description=Datasheet, ComponentLink2URL=http://www.samtec.com/documents/webfiles/pdf/TSW_TH.PDF, ComponentLink3Description="Package Specification", ComponentLink3URL=http://www.samtec.com/documents/webfiles/cpdf/TSW-XXX-XX-XXX-X-XX-XXX-MKT.pdf, DatasheetVersion=F-214, Mounting Technology=Through-hole, Orientation=Vertical, PackageDescription=".025[0.64] SQ. Post Terminal Strip Assembly", PackageReference=TSW-104-08-X-S, PackageVersion="DM, 8/1988", PartNumber=TSW-104-08-G-S, Pitch="2.54 mm", RoHS=True
R1 R2 R5: library part CMP-2000-04825-3, "RES 1.3KΩ 1.00% 0.1W 0603", Case Code (Imperial)=0603, Case Code (Metric)=1608, Max Operating Temperature=155°C, Max Power Dissipation=100mW, Min Operating Temperature=-55°C, Resistance=1.3kR, Resistor Type="Thick Film", Temperature Coefficient=100ppm/°C, Tolerance=1%, Voltage Rating=50V, Case/Package=0603, Construction=Rectangular, Depth=0.8mm, Features="Moisture Resistant", Height=0.022inch, Length=1.6mm, Military Standard=Not, Number of Terminations=2, Packaging="Tape and Reel", Power Rating=100mW, RoHS Compliant=Yes, Series=AC, Termination=SMD/SMT, Width=0.8mm
R3 R4 R14 R15: library part CMP-009-00189-1, "Res Thick Film 0603 5.1K Ohm 1% 0.1W(1/10W) ±100ppm/C Pad SMD T/R", Case Code (Imperial)=0603, Max Operating Temperature=155°C, Max Power Dissipation=100mW, Min Operating Temperature=-55°C, Temperature Coefficient=100ppm/°C, Tolerance=1%, Voltage Rating=75V, Voltage Rating (DC)=50V, Case/Package=0603, China RoHS=Non-Compliant, Composition="Thick Film", Depth=800µm, Features="Moisture Resistant", Height=450µm, Lead Free="Lead Free", Lifecycle Status=Production, Military Standard=Not, Mounting Technology="Surface Mount", Number of Terminals=2, Number of Terminations=2, Packaging="Tape & Reel", Pins=2, Power Dissipation=100mW, Power Rating=100mW, REACH SVHC=Yes, RoHS=Compliant, Schedule B="8533210045, 8533210045", Termination=SMD/SMT, Width=800µm, Working Voltage=75V
R6 R7: library part CMP-009-00187-1, "100mW Thick Film Resistors ±100ppm/℃ ±1% 10kΩ 0603 Chip Resistor - Surface Mount ROHS", Case Code (Imperial)=0603, Max Operating Temperature=155°C, Min Operating Temperature=-55°C, Power Dissipation=100mW, Temperature Coefficient=100ppm/°C, Tolerance=1%, Voltage Rating=75V, Voltage Rating (DC)=50V, Case Code (Metric)=0603, Case/Package=0603, China RoHS=Non-Compliant, Composition="Thick Film", Depth=800µm, Height=450µm, Lead Free="Lead Free", Lead Pitch=300µm, Length=1.6mm, Lifecycle Status=Production, Military Standard=Not, Mounting Technology="Surface Mount", Number of Terminals=2, Packaging="Tape & Reel", Pins=2, Power Rating=100mW, REACH SVHC=Yes, RoHS=Compliant, Schedule B="8533210045, 8533210045", Termination=SMD/SMT, Weight=2.012816mg, Width=800µm, Working Voltage=75V
R8 R9 R10 R11: library part CMP-009-00190-1, "Res Thick Film 1.6 x 0.8 mm 4.7K Ohm 1% 0.1W(1/10W) 100ppm/ C Molded SMD Paper T/R", Case Code (Imperial)=0603, Max Operating Temperature=155°C, Min Operating Temperature=-55°C, Power Dissipation=100mW, Temperature Coefficient=100ppm/°C, Tolerance=1%, Voltage Rating=75V, Voltage Rating (DC)=50V, Case/Package=0603, China RoHS=Non-Compliant, Composition="Thick Film", Country of Origin="Mainland China, Taiwan", Depth=800µm, Export Control Classification Number (ECCN) Code=EAR99, Harmonized Tariff Schedule (HTS) Code=8533.21.00.30, Height=450µm, Introduction Date=2004-09-22, Lead Free="Lead Free", Lead Pitch=300µm, Length=1.6mm, Lifecycle Status=Production, Military Standard=Not, Mounting Technology="Surface Mount", Number of Terminals=2, Packaging="Tape & Reel", Pins=2, Power Rating=100mW, REACH SVHC=Yes, RoHS=Compliant, Schedule B="8533210045, 8533210045", Termination=SMD/SMT, Width=800µm, Working Voltage=75V
R12 R13: library part CMP-009-00188-1, "Zero Ohm Resistor, Jumper, 0603 [1608 Metric], Thick Film, 100 mW, 1 A, Surface Mount", Case Code (Imperial)=0603, Current Rating=1A, Max Operating Temperature=155°C, Max Power Dissipation=100mW, Min Operating Temperature=-55°C, Temperature Coefficient=200ppm/°C, Tolerance=1%, Voltage Rating=75V, Voltage Rating (DC)=50V, Case/Package=0603, China RoHS=Non-Compliant, Composition="Thick Film", Contact Plating=Tin, Depth=800µm, Features="Moisture Resistant", Height=450µm, Lead Free="Lead Free", Length=1.6mm, Lifecycle Status=Production, Military Standard=Not, Mounting Technology="Surface Mount", Number of Terminals=2, Number of Terminations=2, Packaging="Tape & Reel", Pins=2, Power Dissipation=100mW, Power Rating=100mW, Radiation Hardening=No, REACH SVHC=Yes, RoHS=Compliant, Schedule B="8533210045, 8533210045", Termination=SMD/SMT, Width=800µm, Working Voltage=75V
SW1 SW2 SW3: library part CMP-011-00016-4, "Tact switch- 6x6mm"
SW4: library part CMP-011-00015-2, "A self locking-latch like switch.", Current Rating=500mA, Voltage Rating=250V, Max Current Rating=500mA, Pins=6
U1: library part CMP-009-000000-1, "Description", Manufacturer_Name=TOPPOWER, Copyright="Copyright (C) 2026 Ultra Librarian. All rights reserved.", Design Item ID=TP4056-42-ESOP8, Manufacturer_Part_Number=TP4056-42-ESOP8, RefDes=RefDes, Source=TP4056-42-ESOP8.SchLib, Type=Type
U2: library part CMP-010-00024-1, "Air Quality Sensor CO2 Sensor 2.5V/3.3V/5V 20-Pin SMD EP T/R", Max Operating Temperature=60°C, Max Supply Voltage=5.5V, Min Operating Temperature=-10°C, Min Supply Voltage=2.4V, Height=5.5mm, Length=10.1mm, Lifecycle Status=Production, Mounting Technology="Surface Mount", Number of Terminals=21, Output Configuration=Digital, REACH SVHC=Yes, RoHS=Compliant, Schedule B=9031808080
U3: library part CMP-013-00038-1, "P-CHANNEL 8-V (D-S) MOSFET", Manufacturer_Name=Vishay, Copyright="Copyright (C) 2025 Ultra Librarian. All rights reserved.", Design Item ID=SI2305CDS-T1-GE3, Manufacturer_Part_Number=SI2305CDS-T1-GE3, Source=SI2305CDS-T1-GE3.SchLib
U4: library part CMP-019-00056-1, "Switching Regulator, Voltage-mode, 1A, 1800kHz Switching Freq-Max, PDSO6", Max Operating Temperature=85°C, Max Output current=1A, Max Supply Voltage=5.5V, Max Switching Frequency=1.8MHz, Min Input Voltage=2.5V, Min Operating Temperature=-40°C, Switching Frequency=1.5MHz, Temperature Grade=Industrial, Mounting Technology="Surface Mount", Number of Terminals=6, Output Current=1A, Output Type=Fixed
U5: library part CMP-003-000000-2, "NOx and VOC Sensor with a Secondary Humidity and Temperature Output", Manufacturer_Name=Sensirion, Copyright="Copyright (C) 2026 Ultra Librarian. All rights reserved.", Design Item ID=SGP41-D-R4, Manufacturer_Part_Number=SGP41-D-R4, RefDes=RefDes, Source=SGP41-D-R4.SchLib, Type=Type

## Free pads (board coordinates)
  rect 0x0 hole 2.5 unplated: 1(33.461,47.364) 3(14,-1) 4(34.25,13)
  rect 2x2 smd: 1(34.25,31.5) 2(34.25,28.75)
  rect 0x0 hole 1.75 unplated: 5(15,35.5) 6(12.25,38)
  rect 2x2 smd far side: 11(34.25,31.5) 12(34.25,28.75)

## Via types
v1: diameter 0.8, hole 0.3, Top Layer to Bottom Layer, 40 vias
v2: diameter 0.8, hole 0.4, Top Layer to Bottom Layer, 21 vias
v3: diameter 0.55, hole 0.3, Top Layer to Bottom Layer, 10 vias
v4: diameter 0.6, hole 0.4, Top Layer to Bottom Layer, 6 vias

## Nets (pads, with @x,y where several pads share a name; then routed paths per layer and width w, separated by ;. In a path a pad name is that pad's centre, name@x,y a point inside that pad or via, vN(x,y) a via of type N, cw(c..) or ccw(c..) an arc to the next point about the centre after c; other vN are vias at no path point)
*CHRG: R1.1 U1.7 | length 4.9
  Top Layer w0.3: R1.1 28,41.177 28,39.5 28.701,38.799 U1.7
*STDBY: R2.1 U1.6 | length 6.4
  Top Layer w0.3: U1.6 29.351,38.851 30,39.5 31,39.5 31.75,40.25 R2.1
BOOT_PU: MD1.5 R7.2 | length 1.8
  Top Layer w0.25: MD1.5 5,12.881 5,12.2 5.35,11.85 R7.2
CSB: J1.4 R3.2 | length 2.7
  Top Layer w0.25: J1.4 30.005,22.305 30.715,23.015 R3.2
EN_ESP32_PU: C11.1 MD1.8 R6.2 SW2.3 | length 7.9
  Top Layer w0.25: MD1.8 7.338,12.849 7.338,12.313 6.809,11.785 6.809,11.286 R6.2 7.473,11.227 7.825,10.875 C11.1 8.598,9.002 9.45,8.15 SW2.3
GND: C1.1 C2.1 C3.1 C4.1 C5.1 C6.1 C7.1 C8.1 C9.2 C10.1 C11.2 C12.1 C13.1 C14.1 C15.1 C17.1 J1.2 J1.9 J1.P1 J1.P2 J2.13 J2.14 J2.15 J2.16 J2.A1-B12 J2.B1-A12 MD1.1 MD1.2 MD1.11 MD1.14 MD1.36 MD1.37 MD1.38 MD1.39 MD1.40 MD1.41 MD1.42 MD1.43 MD1.44 MD1.45 MD1.46 MD1.47 MD1.48 MD1.49 MD1.50 MD1.51 MD1.52 MD1.53 P1.4 pad.2 pad.12 R3.1 R4.1 R5.1 R14.1 R15.1 SW1.2 SW2.1 SW3.1 U1.1 U1.3 U2.6 U2.20 U2.21 U4.5 U4.7 U5.2 U5.4 U5.7 | length 105.1
  Top Layer w0.25: MD1.49@7.76,16.821 9.271,16.821 10.496,15.596 MD1.14 11.404,15.596 11.75,15.25 11.75,13.5 11.281,13.031 10.92,13.031 MD1.52 ; v1(10.16,26.924) 10.735,26.349 MD1.51 ; v1(25.4,24.384) 25.548,24.384 26.022,23.91 J1.P1 ; J1.9 27.46,20.8 27.686,20.574 27.686,19.177 27.424,18.915 J1.P2@27.151,18.915 ; J1.P2 27.236,18.89 27.654,18.471 27.654,17.939 v1(27.686,17.907) 27.686,17.758 27.35,17.422 R4.1 ; J1.2 29.375,22.905 30.957,24.487 31.658,24.487 R3.1 31.689,24.511 32.258,24.511 32.635,24.134 C3.1 C4.1 32.639,20.011 v1(32.639,18.161)
  Top Layer w0.3: U4.5 U4.7 ; C11.2 9.75,11.077 9.75,12.861 MD1.11 9.81,12.871 MD1.52@10.71,12.871 ; R15.1 10.15,32.9 10.904,33.654 11.054,33.654 v1(11.15,33.75) 11.112,33.788 10.962,33.788 10.15,34.6 R14.1 ; v1(24,14.25) 24.135,14.25 24.301,14.085 25.718,14.085 C14.1 ; C14.1@25.753,14.094 26.347,13.5 27.106,13.5 U5.4 27.209,13.497 27.603,13.497 27.624,13.476 27.827,13.476 28.35,12.953 U5.7 U5.2 30.834,12.75 C15.1 ; 27.305,33.528 28.956,33.528 29.334,33.15 29.334,32.265 U1.3 29.379,32.22 29.379,31.357 29.852,30.884 R5.1
  Top Layer w0.4: v1(21.323,20.29) 21.338,20.305 22.034,20.305 ; C2.1 22.559,19.684 22.284,19.959 22.259,19.959 22.034,20.184 22.034,20.305 ; C1.1 22.559,20.934 22.284,20.659 22.259,20.659 22.034,20.433 22.034,20.305
  Top Layer w0.45: C8.1 19.286,5.936 19.286,6.736 20,7.45 v1(20,7.5) ; C8.1@19.5,5.85 19.513,5.863 21.087,5.863 C7.1 21.155,5.821 23.401,5.821 U2.6
  Top Layer w0.6: J2.14 6.216,29.57 6.617,29.971 6.617,30.635 6.613,30.64 J2.B1-A12
  Top Layer w0.8: v1(8.75,47.75) 9.5,47 U4.7 ; v1(10.5,47.75) 12.45,47.75 C13.1 ; U2.6 24.956,5.766 U2.21 29.956,5.766 U2.20 ; v1(31.75,7.5) 31.456,7.206 U2.20 ; 32.125,29.575 C6.1 ; C17.1 33.484,5.766 U2.20
  Top Layer w1: v1(3.81,19.784) 3.81,20.771 v1(4.797,20.771) MD1.49@5.785,20.771 ; v1(6.773,16.821) 7.76,16.821 v1(7.76,17.808) MD1.49@7.76,18.796 ; v1(6.773,18.796) MD1.49@7.76,18.796 ; 32.125,29.575 32.95,28.75 ; MD1.49@5.785,18.796 v1(5.785,19.784) MD1.49@5.785,20.771 ; MD1.49@5.785,18.796 v1(4.797,18.796) 3.81,18.796 v1(3.81,17.808) 3.82,17.799 3.82,16.91 3.859,16.87 ccw(c3.908,16.87) 3.908,16.821 v1(4.797,16.821) 5.785,16.821 v1(5.785,17.808) MD1.49@5.785,18.796 ; MD1.49@5.785,20.771 v1(6.773,20.771) 7.76,20.771 v1(7.76,19.784) MD1.49@7.76,18.796
  Top Layer w1.2: 32.95,28.75 v2(34.25,28.75)
  other v1: 15,24 16.5,24 19,25 32,26.5 33.5,26.5 35,26.5
  other v2: 24.3,29 25.8,29 24.3,30.4 25.8,30.4 24.3,32 25.75,32
  other v4: 12,40 13.5,40 15,40 12,41.5 13.5,41.5 15,41.5
IRQ_BMV: J1.12 MD1.12 | length 33.2
  Top Layer w0.25: v1(9.25,15.5) 9.323,15.427 9.323,14.977 10.229,14.071 10.61,14.071 MD1.12 ; J1.12 29.799,19.905 30.104,19.6 v1(30.2,19.6)
  Bottom Layer w0.25: v1(9.25,15.5) 9.25,19.504 10.446,20.7 15.876,20.7 20.574,16.002 28.194,16.002 30.2,18.008 v1(30.2,19.6)
MISO: J1.11 R4.2 | length 5.8
  Top Layer w0.25: R4.2 25.2,16.3 24.892,16.608 24.892,18.796 26.296,20.2 J1.11
NetL1_2: L1.2 U4.4 | length 4.2
  Top Layer w0.4: 8.075,46.25 U4.4
  Top Layer w0.5: 7.732,46.593 8.075,46.25
  Top Layer w0.6: L1.2@7.15,46.593 7.732,46.593
  Top Layer w0.8: L1.2 L1.2@7.15,46.6
NetSW4_4: SW4.4 U4.2 | length 5.1
  Top Layer w0.3: U4.2 11.75,45.25 13.5,43.5 SW4.4
P_D_USBA: J2.A5 R14.2 | length 2.4
  Top Layer w0.3: J2.A5 7.86,35.14 8.25,34.75 R14.2@8.65,34.75
P_D_USBB: J2.B5 R15.2 | length 2.5
  Top Layer w0.3: J2.B5 6.448,32.142 7.442,32.142 8,32.7 8.55,32.7 R15.2
PROG_R: R5.2 U1.2 | length 2.3
  Top Layer w0.3: R5.2 28.298,30.898 28.701,31.301 U1.2
R_GREEN_LED: D2.2 R2.2 | length 3.5
  Top Layer w0.3: D2.2 30.675,45.15 31.75,44.075 R2.2
R_RED_LED: D1.2 R1.2 | length 1.9
  Top Layer w0.3: R1.2 29.652,43.098 D1.2
SCL: MD1.18 P1.2 R8.2 U2.9 U5.6 | length 50
  Top Layer w0.25: MD1.18 10.708,18.773 12.477,18.773 v3(12.5,18.75) 14.6,16.65 14.6,12 15.246,11.354 16.146,11.354 P1.2 16.4,11.1 17.7,11.1 18.25,10.55 R8.2 19.8,11.25 26.278,11.25 26.978,11.95 U5.6 ; v3(13.75,2.25) 23.222,2.25 U2.9
  Bottom Layer w0.25: v3(12.5,18.75) 12.5,3.5 v3(13.75,2.25)
SCL_BMV: J1.6 MD1.23 R11.2 SW1.4 | length 26.4
  Top Layer w0.25: MD1.23 11.496,22.796 14.25,25.55 17.05,25.55 18.2,26.7 24.5,26.7 ; R11.2 23,25.2 24.5,26.7 ; J1.6 28.895,21.705 28.1,22.5 28.1,24.6 26,26.7 24.5,26.7
SDA: MD1.19 P1.1 R9.2 U2.10 U5.3 | length 50.4
  Top Layer w0.25: MD1.19 12.296,19.596 12.3,19.6 13.204,19.6 13.704,19.1 v3(13.8,19.1) 13.9,19.1 16.25,16.75 P1.1 20.39,13.79 R9.2 20.6,13.9 21.725,15.025 28.419,15.025 29.462,13.982 29.462,13.628 29.541,13.55 U5.3 ; v3(18.7,0.9) 23.322,0.9 U2.10
  Bottom Layer w0.25: v3(13.8,19.1) 13.8,4.025 16.925,0.9 v3(18.7,0.9)
SDA_BMV: J1.5 MD1.22 R10.2 | length 17.4
  Top Layer w0.25: MD1.22 20.7,21.996 ; R10.2 21.18,22.93 21.18,22.476 20.7,21.996 ; J1.5 25.1,22 25.096,21.996 20.7,21.996
USB_D_N: J2.A7 J2.B7 R12.1 | length 15.9
  Top Layer w0.334: 3.4,28.8 4.62,27.58 6.13,27.58 R12.1 ; 3.401,28.801 3.401,33.542 3.6,33.741 v3(3.6,33.8) ; v3(4.7,35.4) 4.742,35.358 4.742,34.836 4.937,34.64 J2.B7 7.304,34.64 7.5,34.445 7.5,33.835 7.304,33.64 J2.A7
  Bottom Layer w0.334: v3(3.6,33.8) 4.7,34.9 v3(4.7,35.4)
USB_D_P: J2.A6 J2.B6 R13.1 | length 16.2
  Top Layer w0.334: v3(2.5,33.8) 2.5,33.745 2.906,33.339 2.906,29.006 ; 2.905,29.005 2.905,28.595 3.05,28.45 4.767,26.733 5.117,26.733 R13.1 ; v3(3.6,35.4) 3.6,35.279 4.733,34.146 5.612,34.146 5.619,34.14 ; J2.B6 6.44,33.145 5.601,33.145 5.405,33.341 5.405,33.927 5.619,34.14 ; J2.A6 5.619,34.14
  Bottom Layer w0.334: v3(2.5,33.8) 2.5,34.3 v3(3.6,35.4)
USB_N: MD1.26 R12.2 | length 3.5
  Top Layer w0.341: R12.2 8.265,27.585 8.265,27.224 8.836,26.653 8.836,25.369 8.956,25.249 8.956,24.725 MD1.26
USB_P: MD1.27 R13.2 | length 3.2
  Top Layer w0.341: R13.2 7.203,26.653 8.127,26.653 8.334,26.446 8.334,25.369 8.214,25.249 8.214,24.725 MD1.27
VBAT: C6.2 pad.1@34.25,31.5 pad.11 U1.5 U3.3 | length 20.3
  Top Layer w0.45: U3.3 26.3,39.25 27.208,38.342 27.208,37.917 v1(27.275,37.85) ; C6.2 32.125,36.225 31.67,36.68 U1.5 30.001,38.001 30.5,38.5 v1(32.25,38.5)
  Top Layer w0.8: C6.2 32.25,35.1 33.15,35.1 34.25,34 34.25,33.25
  Top Layer w1.27: v2(34.25,31.5) 34.25,33.25
  Bottom Layer w0.45: v1(27.275,37.85) 27.37,37.85 28.02,38.5 v1(32.25,38.5)
VBUS: C5.2 D1.1 D2.1 D3.1 J2.A4-B9 J2.B4-A9 U1.4 U1.8 U3.1 | length 8.6
  Top Layer w0.3: C5.2 26,36.3 26.4,36.7 28.031,36.7 U1.8
  Top Layer w0.4: 28.051,35.349 U1.8 ; U1.4 30.001,33.399
  Top Layer w0.6: 28.051,35.349 30.001,33.399
VDD: C1.2 C2.2 C3.2 C4.2 C7.2 C8.2 C9.1 C10.2 C12.2 C14.2 C15.2 C17.2 J1.1 J1.3 J1.7 J1.8 J1.10 L1.1 MD1.3 P1.3 R6.1 R7.1 R8.1 R9.1 R10.1 R11.1 U2.7 U2.19 U4.6 U5.1 U5.5 | length 76.8
  Top Layer w0.25: C2.2 23.886,19.685 24.384,19.685 25.023,20.324 25.023,20.959 ; C1.2 25.023,20.959 ; J1.3 27.299,22.6 27.686,22.213 27.686,21.717 28.003,21.4 ; J1.10 28.898,20.505 28.298,21.105 ; C3.2 31.314,21.336 30.48,21.336 30.249,21.105 J1.8 28.298,21.105 ; 25.023,20.959 25.464,21.4 J1.7 28.003,21.4 ; 28.003,21.4 28.298,21.105
  Top Layer w0.3: C10.2@3.643,8.893 C10.2 ; R7.1 5.3,9.823 5.3,8.802 5.9,8.202 v2(5.9,8.2) ; R6.1 6.7,9.823 6.7,8.9 v2(7.4,8.2) ; 17.75,7.25 19.039,8.539 R8.1@19.039,9.25 ; 25.464,23.05 25.527,22.987 ; J1.3 25.914,22.6 25.527,22.987 ; J1.1 26.785,23.175 25.715,23.175 25.527,22.987
  Top Layer w0.35: R9.1 20.625,12.725 20.861,12.725 20.93,12.794 24.416,12.794 ; v1(23.75,12.25) 23.872,12.25 24.416,12.794 ; C14.2@25.703,12.794 24.416,12.794 ; C14.2 25.75,12.772 27.134,12.772 U5.5 ; U5.1 29.722,11.95 30.172,11.5 30.884,11.5 C15.2 30.978,10.772 v1(31.75,10) ; C3.2 C4.2 31.335,17.165 v1(32.25,16.25)
  Top Layer w0.38: MD1.3 3.385,10.951 C9.1@3.409,10.927
  Top Layer w0.4: R10.1 21.4,24.25 21.866,24.25 22.2,23.916 22.2,23.384 22.434,23.15 22.9,23.15 R11.1 25.464,23.05
  Top Layer w0.6: P1.3 16.29,8.71 17.75,7.25 17.75,5.25 18.45,4.55 19.5,4.55 21.073,4.55 cw(c21.073,4.523) C7.2 23.456,4.523 U2.7 ; R8.1 21.696,9.25 21.946,9.5 v1(22,9.5) v1(23.25,9.5) ; U2.19 33.434,4.516 cw(c33.434,4.45) C17.2 33.525,4.45 33.65,4.325 33.65,4.3 34.25,3.7 v1(34.25,3)
  Top Layer w0.8: v2(34.25,-1.5) v2(34.25,0) v2(34.25,1.5) v1(34.25,3)
  Bottom Layer w0.35: v1(23.75,12.25) 23.872,12.25 24.372,12.75
  Bottom Layer w0.45: 24.372,12.75 27.75,12.75
  Bottom Layer w0.55: 27.75,12.75 28.5,12
  Bottom Layer w0.65: 28.5,9.5 28.5,12
  other v2: 5.9,5.2 7.4,5.2 5.9,6.7 7.4,6.7 3.25,40.25 5,40.25 6.75,40.25 8.5,40.25
VIN: C13.2 D3.2 SW4.5 U3.2 U4.3 | length 20
  Top Layer w0.3: U4.3 10.675,45.9 U4.3@10.675,46
  Top Layer w0.4: U4.3@10.675,46 10.975,46.3 C13.2
  Top Layer w0.5: D3.2 D3.2@20.04,37.5
  Top Layer w0.6: C13.2 14.2,46.3 SW4.5 ; D3.2@20.04,37.5 21.25,37.5 22.05,38.3 U3.2
  Top Layer w1.27: v1(17.75,37.5) 17.79,37.46 D3.2
  Bottom Layer w1.27: SW4.5 17,38.25 v1(17.75,37.5)
Wake: MD1.6 SW3.3 | length 16.4
  Top Layer w0.25: MD1.6 5.785,13.642 6.527,14.385 v3(7.007,14.385) ; SW3.3 9.5,1.5 v3(9.5,2.5)
  Bottom Layer w0.25: v3(7.007,14.385) 9.5,11.892 v3(9.5,2.5)
pads on no net: J1.13 J2.17 J2.18 J2.A8 J2.B8 MD1.4 MD1.7 MD1.9 MD1.10 MD1.13 MD1.15 MD1.16 MD1.17 MD1.20 MD1.21 MD1.24 MD1.25 MD1.28 MD1.29 MD1.30 MD1.31 MD1.32 MD1.33 MD1.34 MD1.35 SW1.1 SW1.3 SW2.2 SW2.4 SW3.2 SW3.4 SW4.1 SW4.2 SW4.3 SW4.6 U2.1 U2.2 U2.3 U2.4 U2.5 U2.8 U2.11 U2.12 U2.13 U2.14 U2.15 U2.16 U2.17 U2.18 U4.1

## Polygon pours and split planes (outlines as drawn)
GND on Bottom Layer "GND_Bottom" (solid, pour order 7): -0.75,-2.5 ccw(c0.5,-2.5) 0.5,-3.75 35.5,-3.75 ccw(c35.5,-2.5) 36.75,-2.5 36.75,48.5 ccw(c35.5,48.5) 35.5,49.75 0.5,49.75 ccw(c0.5,48.5) -0.75,48.5 -0.75,1.25
VDD on Bottom Layer "VDD_Bottom" (solid, pour order 5): 32.893,8.75 21.5,8.75 21,9.25 21,9.75 21.5,10.25 29.75,10.25 30.25,10.75 32.036,10.75 32.893,11.607 32.893,13.335 31.242,14.986 31.242,16.637 31.877,17.272 36.478,17.272 cw(c36.478,17.25) 36.5,17.25 36.5,-2.25 cw(c35.25,-2.25) 35.25,-3.5 0.75,-3.5 cw(c0.75,-2.25) -0.5,-2.25 -0.5,22.25 1.25,24 9.5,24 12.6,27.1 12.6,34.289 7.504,39 2.5,39 0.75,41 9,41 11.25,38.75 15.5,34.5 15.5,28 11,23.5 10.366,23.5 9.116,22.25 3.75,22.25 2.75,21.25 2.75,15.5 5,13.25 9.5,13.25 11.25,11.5 11.25,0.75 12.635,-0.635 31.623,-0.635 32.893,0.635
GND on Top Layer "GND_Top" (solid, pour order 13): -0.75,-2.5 ccw(c0.5,-2.5) 0.5,-3.75 35.5,-3.75 ccw(c35.5,-2.5) 36.75,-2.5 36.75,48.5 ccw(c35.5,48.5) 35.5,49.75 0.75,49.75 ccw(c0.75,48.25) -0.75,48.25 -0.75,-1.5
GND on Top Layer "VDD_Bottom" (solid, pour order 12): 27,29.5 27.5,29 32.25,29 33,29.75 35.25,29.75 35.75,29.25 35.75,28.25 35.25,27.75 24,27.75 23.5,28.25 23.5,32.5 25.25,34.25 27,34.25 28.25,33 28.25,31.5 28,31.25 27.5,31.25 27,30.75
VBUS on Top Layer "VDD_Bottom" (solid, pour order 11): 22.5,42.3 26.2,46 28.2,46 28.5,45.7 28.5,42.6 28.2,42.3 26.1,42.3 24.2,40.4 24.2,40 23.8,39.6 21.5,39.6 21.1,39.2 17.5,39.2 16.4,38.1 16.4,36.9 16.7,36.6 17.4,35.9 26.655,35.9 26.804,35.75 26.8,35.746 26.8,34.7 26.7,34.6 17.4,34.6 14,31.2 5.7,31.2 5.7,31.7 11.3,31.7 12.8,33.2 12.8,35.4 12.2,36 5.6,36 5.6,36.6 13.1,36.6 18.8,42.3
VDD on Top Layer "VDD_Bottom" (solid, pour order 10): 5.25,4.75 5.5,4.5 7.75,4.5 8,4.75 8,8.75 7.75,9 4.75,9 4.25,9.5 4.25,11.25 3.75,11.75 3.25,11.75 3,11.5 3,8.75 3.5,8.25 4.5,8.25 5.25,7.5
VDD on Top Layer "GND_Top" (solid, pour order 8): 9.25,44 9.25,40 8.75,39.5 3,39.5 1.5,41 1.5,42.75 1.75,43 6.75,43 7.75,44 7.75,44.5 8,44.75 8.75,44.75 8.906,44.594 8.906,44.344
GND on Top Layer "Buck_GND_Top" (solid, pour order 9): 9.75,41 11.5,39.25 15.25,39.25 15.75,39.75 15.75,41.75 15.25,42.25 11.5,42.25 11,42.75 11,43.25 10.5,43.75 10,43.75 9.75,43.5

## Silkscreen, mask and mechanical layers (free items; w line width, h text height)
Top Overlay:
  text "μAir" at 15.55,32.031 h3
Bottom Overlay:
  drawing of 9 lines, arcs and shapes, not listed
Mechanical 1:
  lines w0.127: -6.25,12.5 ccw(c-5,12.5) -5,11.25 -1.25,11.25 cw(c-1.25,10.75) -0.75,10.75 -0.75,-2.48 ccw(c0.52,-2.48) 0.52,-3.75 35.48,-3.75 ccw(c35.48,-2.48) 36.75,-2.48 36.75,48.48 ccw(c35.48,48.48) 35.48,49.75 0.5,49.75 ccw(c0.5,48.5) -0.75,48.5 -0.75,26.75 cw(c-1.25,26.75) -1.25,26.25 -4.98,26.25 ccw(c-4.98,24.98) -6.25,24.98 -6.25,24.75 -6.25,12.5

## Text inside footprints (layer, text, board x,y; h text height)
U1: Mechanical 13 "*" at 28.823,32.978 h0.51 r90